# Altium PCB CHESSOBC_rev1.PcbDoc (part 2 of 4)
Units mm, origin at the board's own origin, x right, y up, seen from the top; angles counter-clockwise.
Board outline 96.01 x 90.17 mm, 6 copper layers (Top Layer, +3.3V, Layer 2, Layer 3, GND, Bottom Layer), stack 0.816 mm thick; 143 components, 230 nets, 1063 pads, 572 vias.
Unrouted connection lines stored in the file: 5.
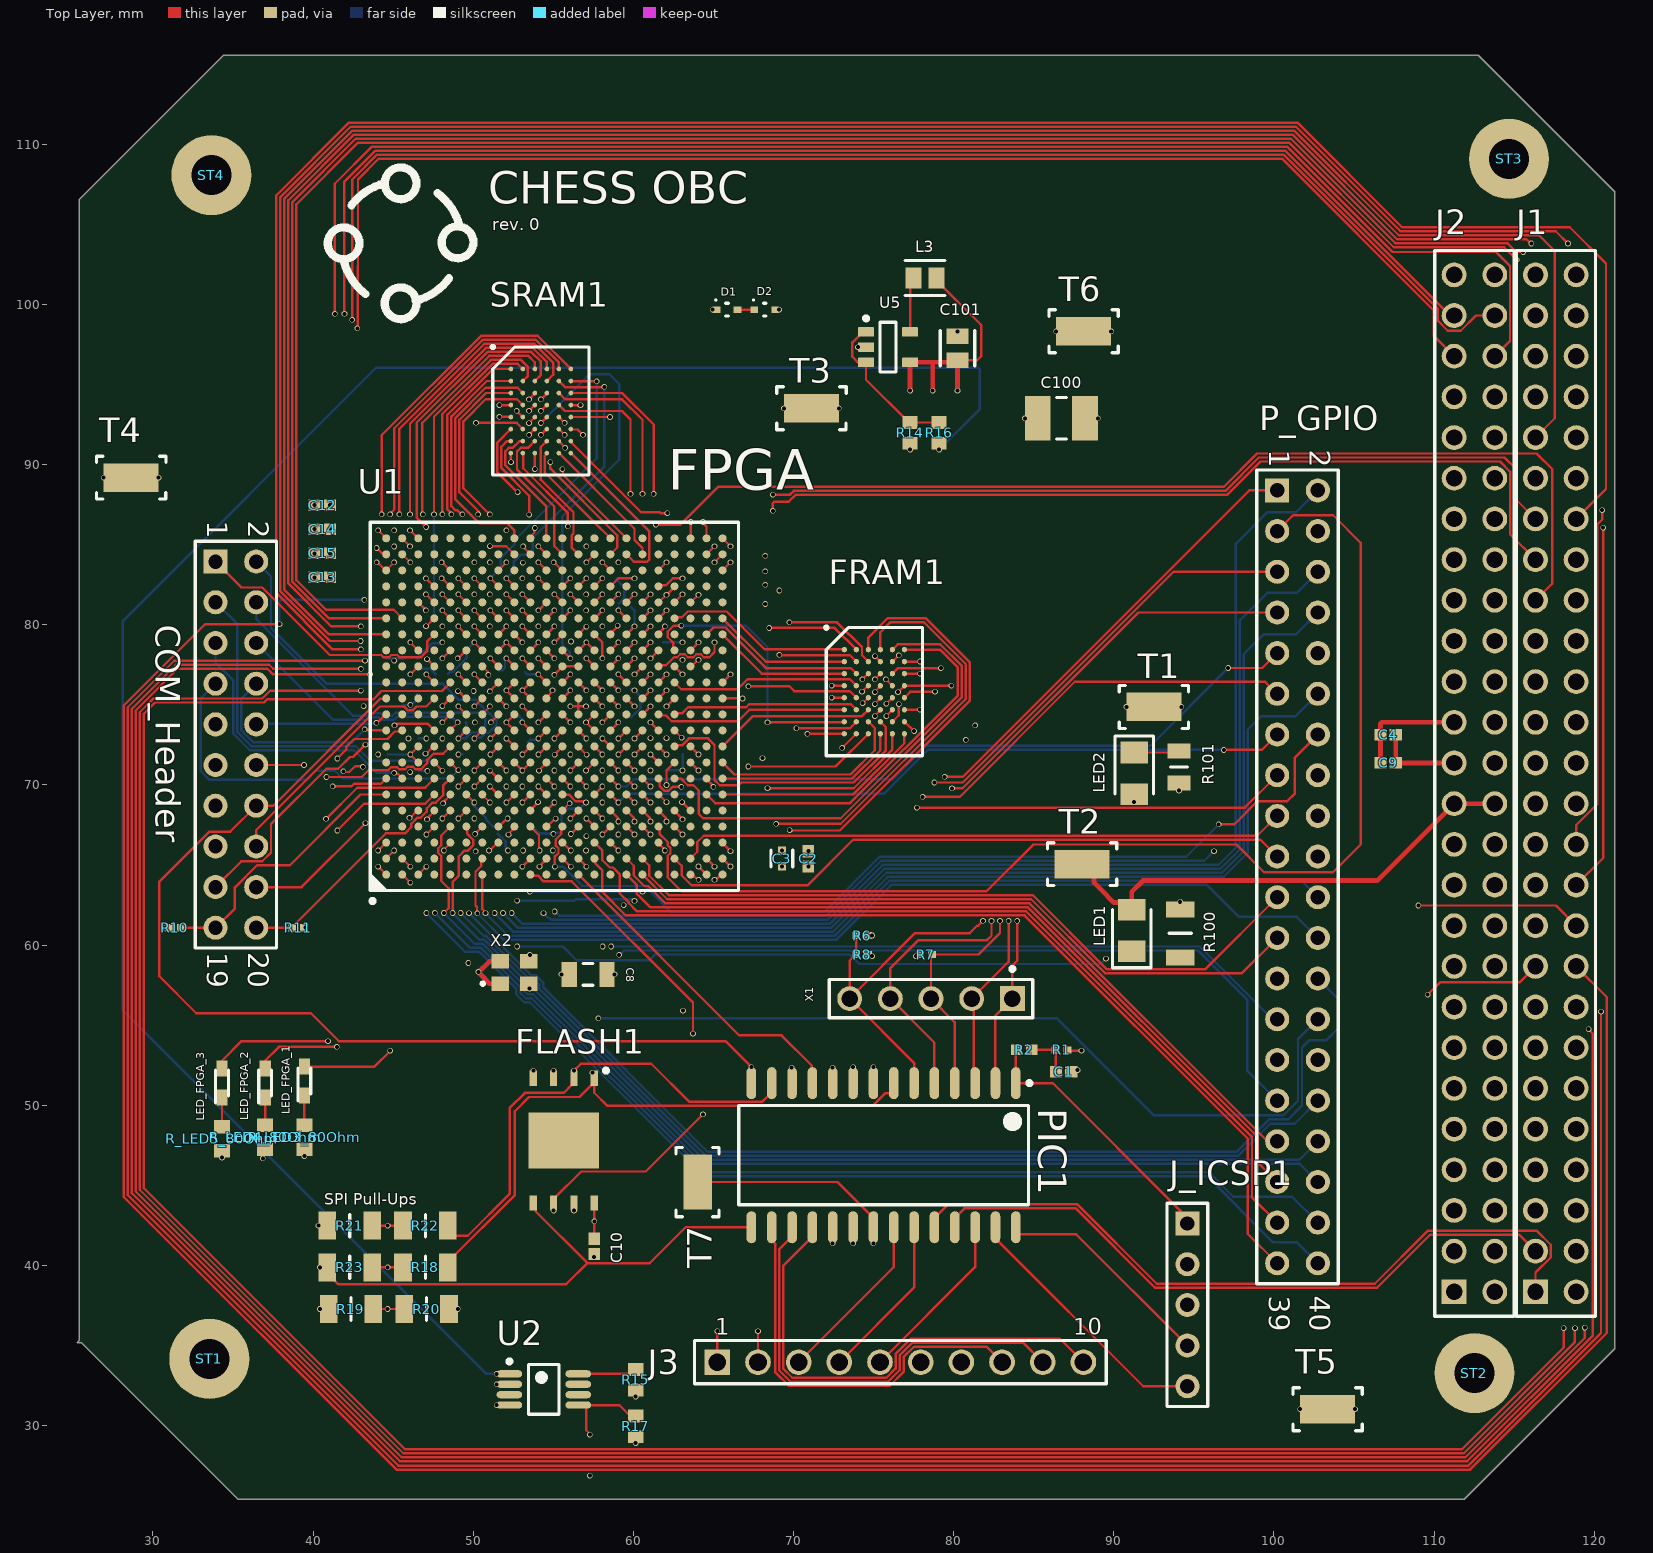
[diagram p0: Top Layer view]

## Via types
v1: diameter 0.35, hole 0.25, Top Layer to Bottom Layer, tented bottom, 572 vias

## Nets (pads, with @x,y where several pads share a name; then routed paths per layer and width w, separated by ;. In a path a pad name is that pad's centre, name@x,y a point inside that pad or via, vN(x,y) a via of type N, cw(c..) or ccw(c..) an arc to the next point about the centre after c; other vN are vias at no path point) (continued)
+1.5V: (continued)
  Top Layer w0.15: v1(46.07,76.906) U1.C14@46.57,77.406 ; v1(46.07,78.906) U1.C15@46.57,78.406 ; U1.C8@46.57,71.406 v1(46.07,71.906) U1.C9@46.57,72.406 ; v1(50.988,65.906) 51.029,65.906 51.529,66.406 U1.H3@51.57,66.406 ; U1.H20@51.57,83.406 v1(52.07,83.906) ; U1.J10@52.57,73.406 v1(52.07,73.906) U1.J11@52.57,74.406 ; U1.J12@52.57,75.406 v1(52.07,75.906) U1.J13@52.57,76.406 ; v1(53.07,71.906) U1.K9@53.57,72.406 ; v1(53.07,77.906) U1.K14@53.57,77.406 ; v1(54.07,71.906) U1.L9@54.57,72.406 ; v1(54.07,77.906) U1.L14@54.57,77.406 ; v1(55.07,76.881) 55.07,76.894 55.57,77.394 U1.M14@55.57,77.406 U1.N14@56.57,77.406 ; v1(55.087,71.889) 55.087,71.906 55.57,72.389 U1.M9@55.57,72.406 ; U1.N9@56.57,72.406 v1(57.084,71.892) ; v1(57.045,73.906) v1@57.057,73.906 ; U1.P10@57.57,73.406 57.557,73.406 v1@57.057,73.906 ; U1.P11@57.57,74.406 57.557,74.406 v1@57.057,73.906 ; U1.P12@57.57,75.406 v1(58.07,74.906) ; U1.P13@57.57,76.406 v1(58.07,75.906) ; v1(58.07,83.906) U1.R20@58.57,83.406 ; U1.R3@58.57,66.406 v1(59.07,65.906) ; U1.Y8@63.57,71.406 v1(64.07,70.906) ; U1.Y9@63.57,72.406 v1(64.07,71.906) ; U1.Y14@63.57,77.406 63.618,77.406 64.022,77.81 v1(64.07,77.81) ; U1.Y15@63.57,78.406 v1(64.07,78.906) ; L3.2@78.94,101.656 78.94,101.505 81.736,98.71 81.736,96.785 81.474,96.523 C101.1@80.24,96.523 C101.1@80.108,96.391
  Top Layer w0.3: v1(77.281,94.627) U5.4@77.281,96.391 78.694,96.391 ; v1@78.691,94.624 v1(78.694,94.627) 78.694,96.391 ; C101.1@80.108,96.391 78.694,96.391 ; v1(80.24,94.627) C101.1@80.24,96.523
  Bottom Layer w0.15: C17.1@44.667,71.92 44.681,71.906 v1(46.07,71.906) ; v1(46.07,76.906) 46.42,77.256 47.31,77.256 47.647,76.92 C25.1@47.668,76.92 ; 49.279,73.192 49.567,73.481 C22.1@49.567,73.92 C22.1@49.546,73.92
  other v1: 69.408,93.524 72.838,93.524